# Altium PCB AirCraft_V1.0.PcbDoc
Units mil, origin at the board's own origin, x right, y up, seen from the top; angles counter-clockwise.
Board outline 840 x 905 mil, 2 copper layers (Top Layer, Bottom Layer); 12 components, 14 nets, 57 pads, 26 vias.
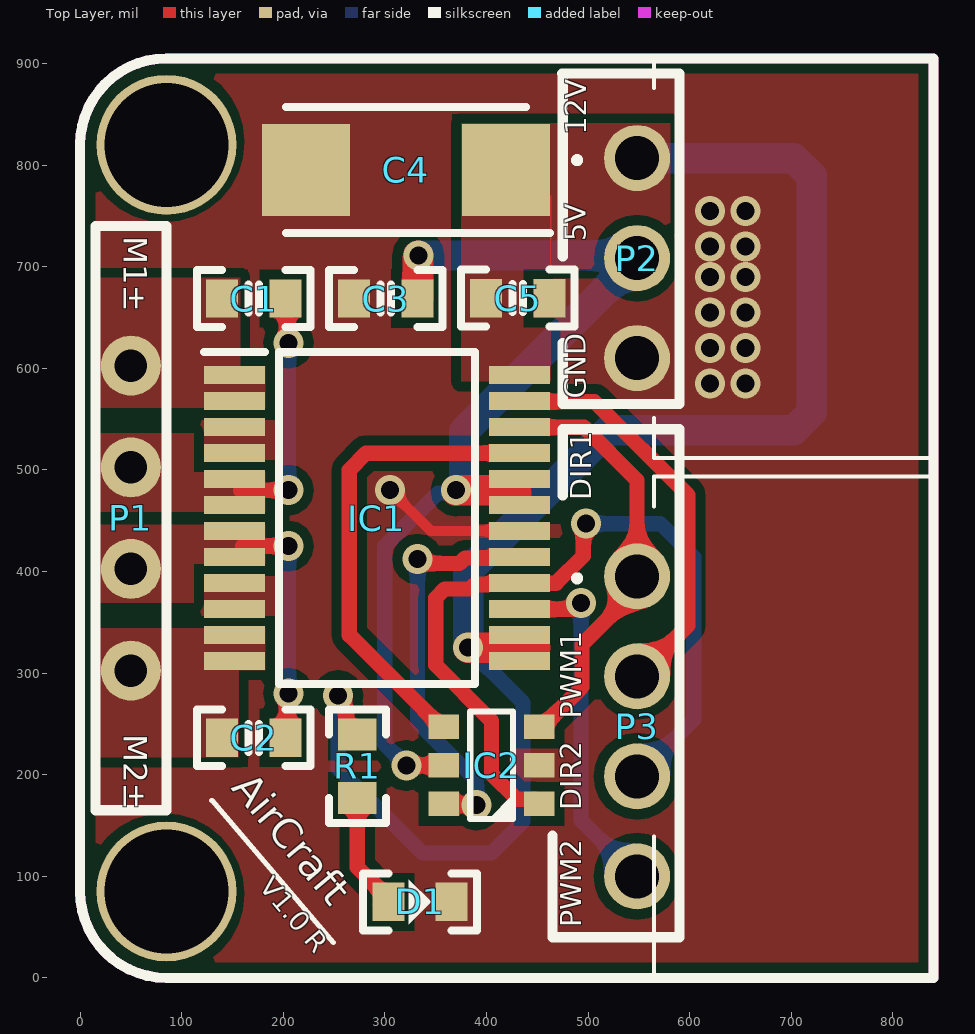
[diagram p0: Top Layer view]
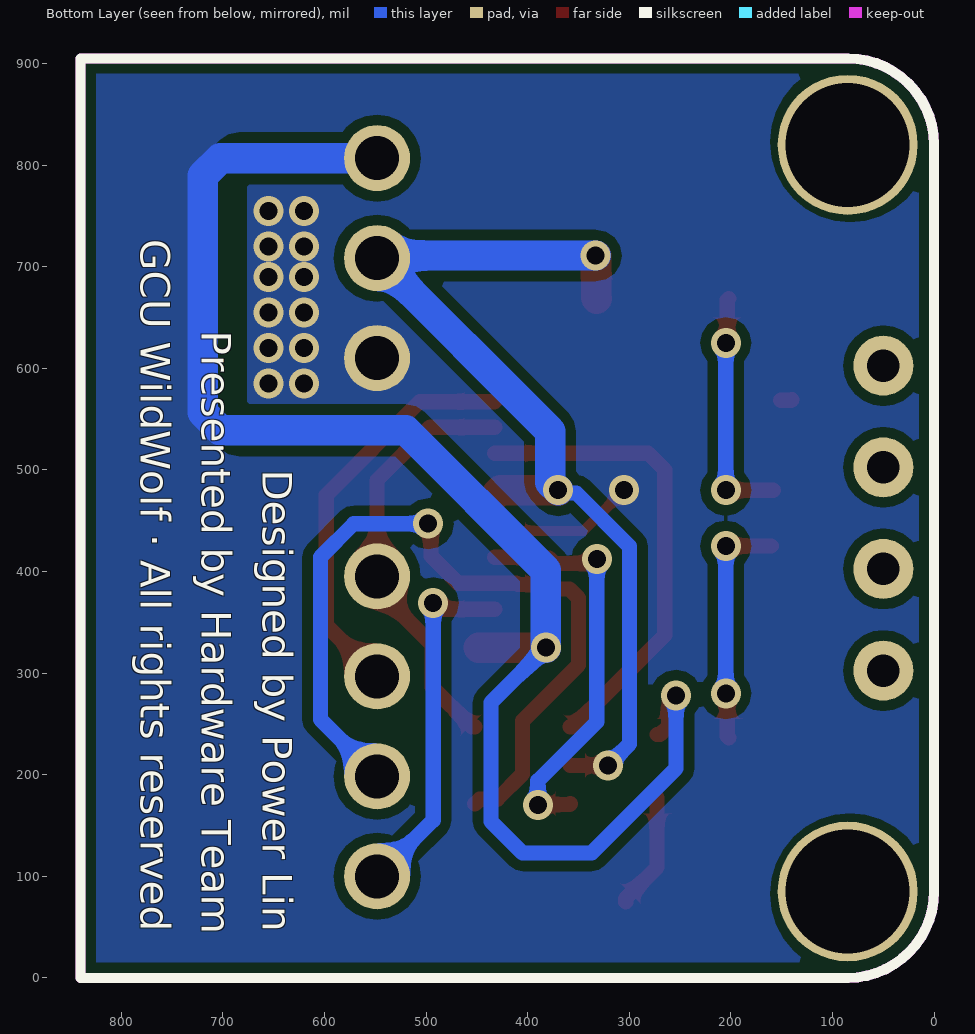
[diagram p1: Bottom Layer view, seen from below]

## Layer stack, top to bottom
Top Solder: solder mask 0.4, Solder Resist, Dk 3.5
Top Layer: signal copper 1.4
Dielectric 1: dielectric 12.6, FR-4, Dk 4.8
Bottom Layer: signal copper 1.4
Bottom Solder: solder mask 0.4, Solder Resist, Dk 3.5

## Board outline
0,85 ccw(c85,85) 85,0 840,0 840,905 85,905 ccw(c85,820) 0,820

## Design rules (kind name [scope] priority, off if disabled: settings)
Clearance [All] p1: gap=10 ignorepadtopadclearanceinfootprint=FALSE except(0: Arc-Hole Track-Hole SMDPad-Hole THPad-Hole Via-Hole Fill-Hole Poly-Hole Region-Hole Text-Hole)
PlaneConnect [All] p1: planeconnectstyle=Direct reliefexpansion=20 reliefentries=4 reliefconductorwidth=10 reliefairgap=10
PolygonConnect [All] p1: connectstyle=Direct reliefconductorwidth=10 reliefentries=4 polygonreliefangle="90 Angle" airgapwidth=10
RoutingVias [All] p1: holewidth=17.72 width=29.53 viastyle="Through Hole" minholewidth=17.72 minwidth=29.53 maxholewidth=17.72 maxwidth=29.53
SolderMaskExpansion [All] p1: expansion=4 istentingtop=FALSE
Width [All] p1: maxlimit=30 minlimit=10 preferedwidth=15
29 further rules are at their usual default settings.

## Classes and differential pairs
component class AirCraft_V1.0: C1 C2 C3 C4 C5 D1 IC1 IC2 P1 R1

## Components (designator, comment, footprint, x,y, rotation, side; value= is the part's Value field where it differs from the comment)
C1 "100nF" CAP-0603 170.95,668.66 r180 top
C2 "100nF" CAP-0603 170.95,236.34 r0 top
C3 "100nF" CAP-0603 300.83,668.66 r0 top
C4 "22uF/25V" CASE-C_6032 320.66,795.28 r180 top
C5 "100nF" CAP-0603 430.72,669 r180 top
D1 "RED" LED-0603 334.65,74.8 r0 top
IC1 "TB6612FNG" SSOP24 292.11,452.5 r0 top locked
IC2 "SN74LVC2G14DBV" SOT-23-6 405,209.28 r0 top
P1 "HDR1x4_2.54" HDR1X4_2.54_90 50,302.51 r180 top
P2 "XH-3AW" XH3AW 548.19,806.85 r270 top locked
P3 "XH-4AW" XH4AW 548.19,395.27 r270 top locked
R1 "4.7k" R-0603 272.83,208.34 r90 top

## Footprints (in the part's own frame and the unit in brackets; to place one, negate y for a bottom-side part, rotate by r counter-clockwise, add the part's x,y. Pads: shape width x height; smd on the part's side, far side on the other; paste and mask are expansions set on the pad)
CAP-0603 [mm]
  rect 0.8x0.96 smd: 1(-0.79,0) 2(0.79,0)
  silkscreen extent -1.42,-0.71 1.42,0.71, body extent -0.76,-0.39 0.76,0.39, height 0.9
CASE-C_6032 [mm]
  rect 2.2x2.3 smd: 1(-2.5,0) 2(2.5,0)
  silkscreen extent -3.6,-1.58 3,1.58, body extent -3,-1.58 3,1.58, height 2.8
HDR1X4_2.54_90 [mm]
  round 1.5 hole 0.813: 1(0,0) 2(0,-2.54) 3(0,-5.08) 4(0,-7.62)
  body extent -0.38,-8.79 10.76,1.17, height 2.52
LED-0603 [mm]
  rect 0.8x0.96 smd: 1(-0.79,0) 2(0.79,0)
  silkscreen extent -1.42,-0.71 1.42,0.71, body extent -0.81,-0.4 0.81,0.4, height 0.6
R-0603 [mm]
  rect 0.8x0.96 smd: 1(-0.79,0) 2(0.79,0)
  silkscreen extent -1.42,-0.71 1.42,0.71, body extent -0.76,-0.38 0.76,0.38, height 0.41
SOT-23-6 [mil]
  rect 30x24 smd: 1(47,-38) 2(47,0) 3(47,38) 4(-47,38) 5(-47,0) 6(-47,-38)
  silkscreen extent -21,-53 21,53, body extent -55,-57 55,57, height 57
SSOP24 [mm]
  rect 1.525x0.45 smd: 1(-3.562,3.575) 2(-3.562,2.925) 3(-3.562,2.275) 4(-3.562,1.625) 5(-3.562,0.975) 6(-3.562,0.325) 7(-3.562,-0.325) 8(-3.562,-0.975) 9(-3.562,-1.625) 10(-3.562,-2.275) 11(-3.562,-2.925) 12(-3.562,-3.575) 13(3.562,-3.575) 14(3.562,-2.925) 15(3.562,-2.275) 16(3.562,-1.625) 17(3.562,-0.975) 18(3.562,-0.325) 19(3.562,0.325) 20(3.562,0.975) 21(3.562,1.625) 22(3.562,2.275) 23(3.562,2.925) 24(3.562,3.575)
  silkscreen extent -4.33,-4.15 2.45,4.15, body extent -3.8,-4.15 3.8,4.15, height 1.6
XH3AW [mm]
  round 1.65 hole 1.1: 1(0,0) 2(2.5,0) 3(5,0)
  silkscreen extent -2.5,-1.55 7.5,7.42, body extent -2.5,-0.45 7.5,7.42, height 6
XH4AW [mm]
  round 1.65 hole 1.1: 1(0,0) 2(2.5,0) 3(5,0) 4(7.5,0)
  silkscreen extent -2.5,-1.55 10,7.42, body extent -2.5,-0.45 10,7.42, height 6

## Part data
C1 C2 C3 C5: library part CAP, "贴片电容", Package=0402, SuppliersPartNumber=C52923, ComponentLink1Description=供应商链接, ComponentLink1URL=http://www.szlcsc.com/product/details_53938.html, Supplier=LC
C4: library part CAP-POL, "钽电容", Package=3528, SuppliersPartNumber=C16133, ComponentLink1Description=供应商链接, ComponentLink1URL=http://www.szlcsc.com/product/details_16815.html, Supplier=LC
D1: library part LED, "发光二极管", Package=0603, SuppliersPartNumber=C2290, ComponentLink1Description=供应商链接, ComponentLink1URL=http://www.szlcsc.com/product/details_2663.html, Supplier=LC
IC1: "集成电机驱动芯片", Manufacturer_Name=Toshiba, Manufacturer_Part_Number=TB6612FNG(O,EL), Mouser Part Number=757-TB6612FNG(O,EL), Datasheet Link=https://th.mouser.com/datasheet/2/408/TB6612FNG_datasheet_en_20141001-708260.pdf, Height=1.6mm, Mouser Price/Stock=https://www.mouser.co.uk/ProductDetail/Toshiba/TB6612FNGOEL?qs=%2FbfygUuxYr5ys7QLPOzyng%3D%3D
IC2: "变换器", Arrow Part Number=SN74LVC2G14DBVR, Manufacturer_Name="Texas Instruments", Mouser Part Number=595-SN74LVC2G14DBVR, Arrow Price/Stock=https://www.arrow.com/en/products/sn74lvc2g14dbvr/texas-instruments, Datasheet Link=http://componentsearchengine.com/Datasheets/3/SN74LVC2G14DBVR.pdf, Height=1.45mm, Manufacturer_Part_Number=SN74LVC2G14DBVR, Mouser Price/Stock=https://www.mouser.co.uk/ProductDetail/Texas-Instruments/SN74LVC2G14DBVR?qs=q2XTDbzbm6DXbZiJ8Yzjpw%3D%3D
P1: "Header"
P2: library part HDR1x3_2.54, "Header"
P3: library part HDR1x4_2.54, "Header"
R1: library part RES, "贴片电阻", Package=0805, SuppliersPartNumber=C17798, Supplier=LC

## Free pads (board coordinates)
  round 137.8 hole 122.05: 0(85,85) 0(85,820)

## Via types
v1: diameter 29.53, hole 17.72, Top Layer to Bottom Layer, 26 vias

## Nets (pads, with @x,y where several pads share a name; then routed paths per layer and width w, separated by ;. In a path a pad name is that pad's centre, name@x,y a point inside that pad or via, vN(x,y) a via of type N, cw(c..) or ccw(c..) an arc to the next point about the centre after c; other vN are vias at no path point)
5V: C3.2 IC1.19 IC1.20 IC2.5 P2.2 | length 977.1
  Top Layer w15: v1(321,209) 321.14,209.14 357.86,209.14 IC2.5 ; v1@370,479.56 v1(370,480)
  Top Layer w30: C3.2 332.68,669.41 332.68,710.68 v1(333,711) ; v1@370,479.56 370,479.76 426.99,479.76 429.39,477.36
  Bottom Layer w15: v1(321,209) 299.74,230.26 299.74,424.74 352.22,477.22 367.22,477.22 v1(370,480)
  Bottom Layer w30: v1(333,711) 545.61,711 P2.2 378,538.24 378,488 v1(370,480)
12V: C4.1 C5.2 IC1.13 IC1.14 IC1.24 P2.1 R1.2 | length 1499
  Top Layer w15: v1(254,278) 254,274.07 261.43,266.64 261.43,247.69 269.68,239.44 R1.2
  Top Layer w30: v1(382,325) 448,325
  Bottom Layer w15: v1(254,278) 254,206 337,123 405,123 436,154 436,271 v1(382,325)
  Bottom Layer w30: v1(382,325) 382,401 520,539 702.43,539 720,556.57 720,789.28 702.43,806.85 P2.1
DIR1: IC1.22 IC2.3 P3.1 | length 421.6
  Top Layer w15: IC1.22 495.93,542.07 548.19,489.81 548.19,382.19 494,328 494,286.28 455,247.28 IC2.3
DIR2: IC1.16 IC2.1 P3.3 | length 808.9
  Top Layer w15: IC2.1 447.5,175.78 429.97,175.78 405,200.75 405,253 350,308 350,373.95 358.79,382.74 383.72,382.74 388.15,387.17 409.83,387.17 411.19,388.52 468.52,388.52 495.22,415.22 495.22,440.29 498,443.07 v1(498,447)
  Bottom Layer w15: v1(498,447) 571.21,447 604,414.21 604,254.23 P3.3
GND: C3.1 C4.2 C5.1 D1.2 IC1.3 IC1.4 IC1.9 IC1.10 IC1.18 IC2.2 P2.3 | length 144.2
  Top Layer w10: v1(305,480) 345,440 432.35,440 IC1.18
  other v1: 620,585 655,585 620,620 655,620 620,655 655,655 620,690 655,690 620,720 655,720 620,755 655,755
NetC1_1: C1.1 IC1.5 IC1.6 P1.3 | length 237
  Top Layer w15: 157.95,479.87 204.87,479.87 v1(205,480) ; C1.1 203.52,667.18 203.52,626.48 v1(205,625)
  Bottom Layer w15: v1(205,480) v1(205,625)
NetC1_2: C1.2 IC1.1 IC1.2 P1.4 | length 22.7
  Top Layer w15: P1.4 P1.4@57.9,594.61 ; IC1.2@139.84,569.02 140.44,568.43 IC1.2@151.11,568.43
NetC2_1: C2.1 IC1.11 IC1.12 P1.1
NetC2_2: C2.2 IC1.7 IC1.8 P1.2 | length 234.9
  Top Layer w15: 160,425 v1(205,425) ; C2.2 203.52,237.82 203.52,278.52 v1(205,280)
  Bottom Layer w15: v1(205,280) v1(205,425)
NetD1_A: D1.1 R1.1 | length 115.2
  Top Layer w15: R1.1 272.83,108.66 303.54,77.95 D1.1
NetIC1_17: IC1.17 IC2.6 | length 403.5
  Top Layer w15: v1(332,412.1) 335.93,412.1 340.29,407.74 373.36,407.74 378.97,413.35 409.83,413.35 410.6,414.11 IC1.17 ; IC2.6 358.64,170.64 389.36,170.64 v1(390,170)
  Bottom Layer w15: v1(332,412.1) 332,252 390,194 v1(390,170)
NetIC1_21: IC1.21 IC2.4 | length 467.2
  Top Layer w15: IC2.4 355,247.28 265,337.28 265,500 281.48,516.48 IC1.21
PWM1: IC1.23 P3.2 | length 403.2
  Top Layer w15: IC1.23 432.94,567.07 506.29,567.07 598.17,475.19 598.17,346.82 P3.2
PWM2: IC1.15 P3.4 | length 355
  Top Layer w15: IC1.15 483,362.93 489.07,369 v1(493,369)
  Bottom Layer w15: v1(493,369) 493,155.18 P3.4

## Polygon pours and split planes (outlines as drawn)
GND on Top Layer "GND_L01_P019" (solid, remove dead copper, pour order 19): 840,0 840,905 0,905 0,0
12V on Top Layer "12V_L01_P017" (solid, pour order 17): 440,787 581,787 581,688 440,688
GND on Top Layer "GND_L01_P016" (solid, pour order 16): 446,688 581,688 581,585 446,585
no net on Top Layer "NONET_L01_P013" (solid, pour order 13): 462,941
no net on Top Layer "NONET_L01_P012" (solid, pour order 12): 463,697.9 463,770
no net on Top Layer "NONET_L01_P011" (solid, pour order 11): 463,697.9 463,770
12V on Top Layer "12V_L01_P010" (solid, pour order 10): 375,587 375,841 581,841 581,770 463,770 463,587
no net on Top Layer "NONET_L01_P008" (solid, pour order 8): 122,448
no net on Top Layer "NONET_L01_P007" (solid, pour order 7): 182,446
no net on Top Layer "NONET_L01_P006" (solid, pour order 6): 122,448
NetC2_2 on Top Layer "NETC2_2_L01_P005" (solid, pour order 5): 182,446 182,369 16,369 16,446
NetC1_2 on Top Layer "NETC1_2_L01_P002" (solid, pour order 2): 157.48,688.98 157.48,602 182,602 182,559 16,559 16,688.98
NetC2_1 on Top Layer "NETC2_1_L01_P003" (solid, pour order 3): 182,344 182,303 156,303 156,217 16,217 16,344
NetC1_1 on Top Layer "NETC1_1_L01_P004" (solid, pour order 4): 182,536 182,459 16,459 16,536
no net on Top Layer "NONET_L01_P000" (solid, pour order 0): 157.48,688.98
GND on Bottom Layer "GND_L02_P020" (solid, remove dead copper, pour order 20): 0,0 840,0 840,905 0,905

## Keep-outs
Keep-Out Layer:
  the board outline again, w10

## Silkscreen, mask and mechanical layers (free items; w line width, h text height)
Top Overlay:
  lines w5: 129.59,174.65 249.59,34.65
  lines w10: 465,140 465,40 590,40 590,540 475,540 475,475 ; 475,625 475,565 590,565 590,890 475,890 ; 475,710 475,890 ; 475,890 474.27,890 475,890 ; 0,85 ccw(c85,85) 85,0 840,0 840,905 85,905 ccw(c85,820) 0,820 0,85 ; 15,165 85,165 85,740 15,740 15,300 15,165
  text "12V" at 505,830 h35 r90
  text "M1±" at 35,730 h40 r270
  text "5V" at 504.64,725 h35 r90
  text "GND" at 504.64,570 h35 r90
  text "DIR1" at 510,470 h35 r90
  text "PWM1" at 500,255 h35 r90
  text "M2±" at 35,240 h40 r270
  text "AirCraft" at 140.4,180.33 h50 r310
  text "DIR2" at 500,165 h35 r90
  text "V1.0 R" at 170.28,85.2 h33 r310
  text "PWM2" at 500,50 h35 r90
Bottom Overlay:
  the board outline again, w10
  text "GCU WildWolf · All rights reserved" at 790.6,726.8 h50 r90
  text "Presented by Hardware Team" at 730.6,636.89 h50 r90
  text "Designed by Power Lin" at 670.6,500 h50 r90
Mechanical 1:
  the board outline again, w10